# Altium PCB PCB1.PcbDoc
Units mm, origin at the board's own origin, x right, y up, seen from the top; angles counter-clockwise.
Board outline 50 x 30 mm, 2 copper layers (Top Layer, Bottom Side); 3 components, 34 nets, 78 pads, 0 vias.
Unrouted connection lines stored in the file: 3.
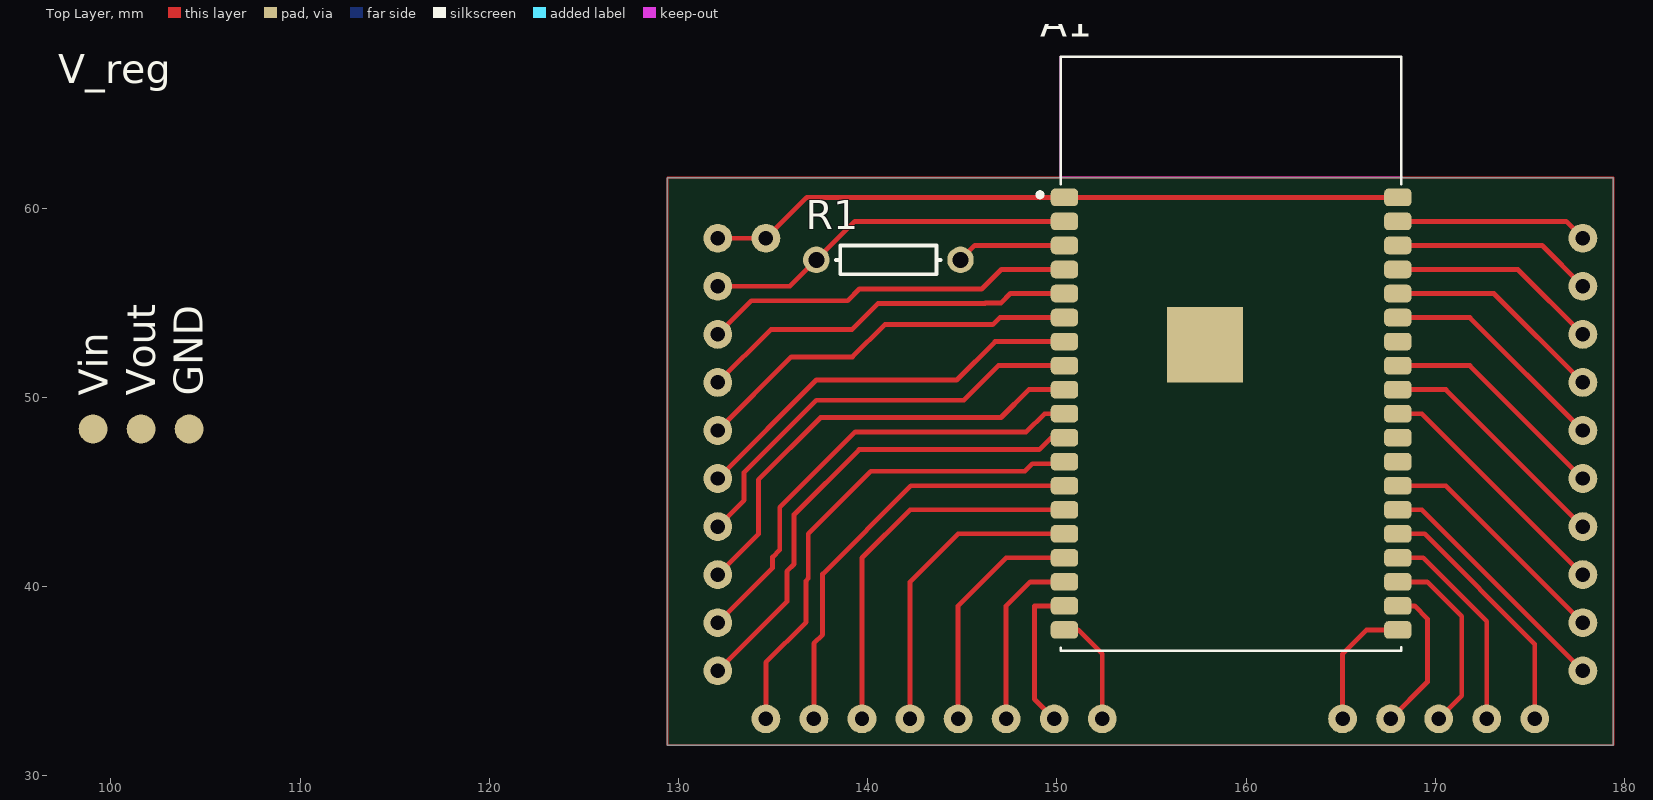
[diagram p0: Top Layer view]
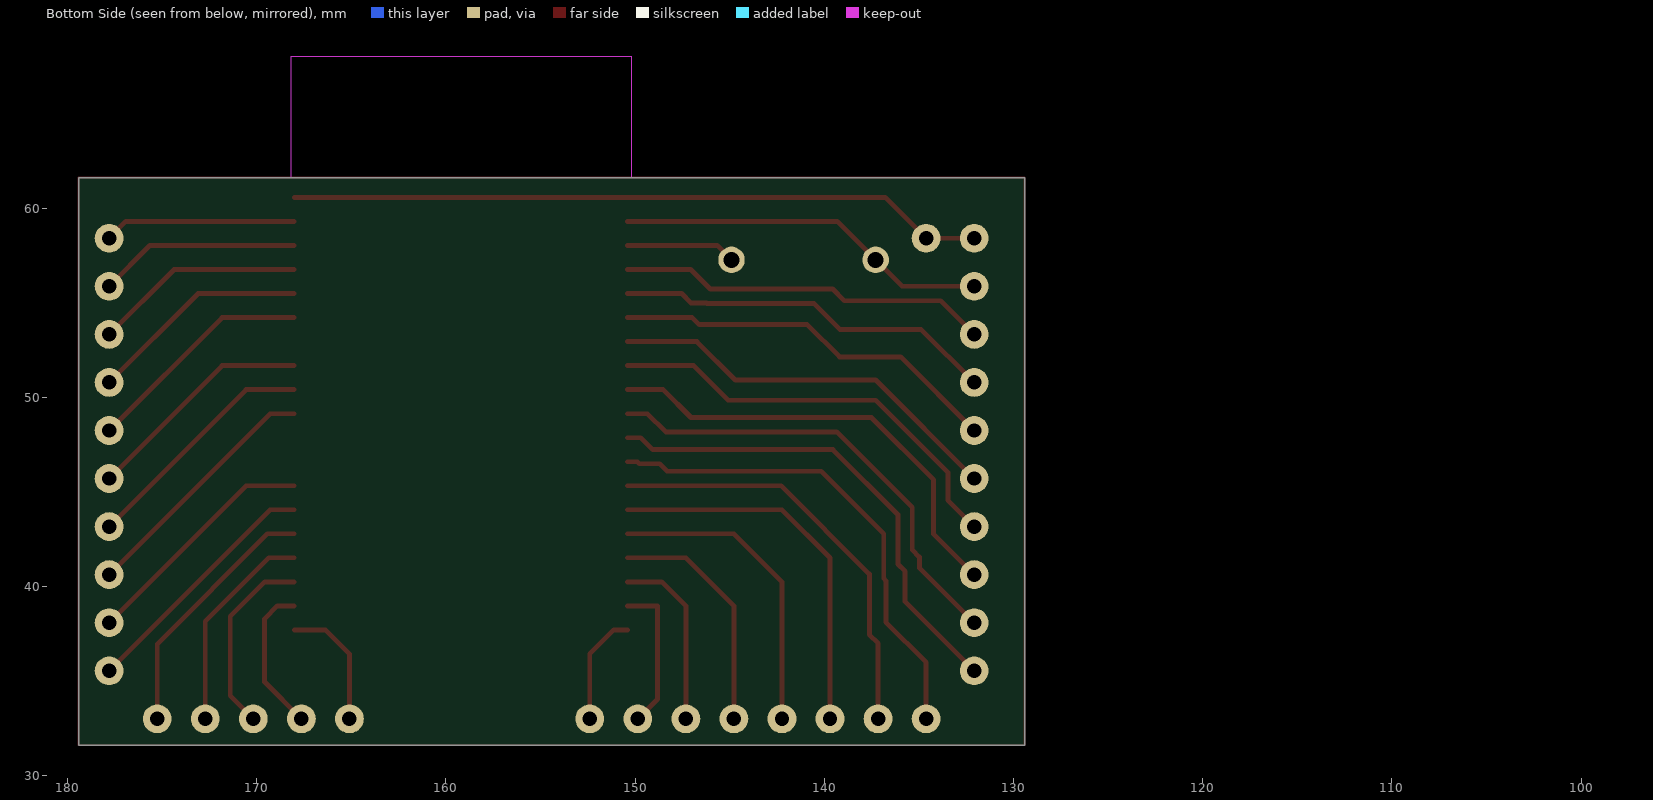
[diagram p1: Bottom Side view, seen from below]

## Layer stack, top to bottom
Top Solder: solder mask 0.0102, Solder Resist, Dk 3.5
Top Layer: signal copper 0.0356
Dielectric 1: dielectric 0.32, FR-4, Dk 4.8
Bottom Side: signal copper (thickness not stored)

## Board outline
129.413,31.623 129.413,61.623 179.413,61.623 179.413,31.623

## Design rules (kind name [scope] priority, off if disabled: settings)
Clearance [All] p1: gap=0.5 ignorepadtopadclearanceinfootprint=FALSE
PolygonConnect [All] p1: connectstyle=Relief reliefconductorwidth=0.254 reliefentries=4 polygonreliefangle="90 Angle" airgapwidth=0.254
RoutingVias [All] p1: holewidth=0.711 width=1.27 viastyle="Through Hole" minholewidth=0.711 minwidth=1.27 maxholewidth=0.711 maxwidth=1.27
SolderMaskExpansion [All] p1: expansion=0.102 istentingtop=FALSE
Width [All] p1: maxlimit=0.254 minlimit=0.254 preferedwidth=0.254 substack1={1347EED0-281A-4116-A668-90E2841A33EA}
30 further rules are at their usual default settings.

## Components (designator, comment, footprint, x,y, rotation, side; value= is the part's Value field where it differs from the comment)
A1 "ESP32-WROVER-I" XCVR_ESP32-WROVER-I 159.211,52.319 r0 top
R1 "Res1" AXIAL-0.3 141.097,57.277 r180 top value=10K
V_reg "AMS1117 Breakout Board" "AMS1117 Breakout Board" 101.6,53.34 r0 top

## Footprints (in the part's own frame and the unit in brackets; to place one, negate y for a bottom-side part, rotate by r counter-clockwise, add the part's x,y. Pads: shape width x height; smd on the part's side, far side on the other; paste and mask are expansions set on the pad)
"AMS1117 Breakout Board" [mil]
  round 60 smd: GND(100,-196.85) VIN(-100,-196.85) VOUT(0,-196.85)
  body extent -173,-251 173,472, height 171
AXIAL-0.3 [mm] "Axial Device, Thru-Hole; 2 Leads; 0.3 in Pin Spacing"
  round 1.4 hole 0.85: 1(-3.81,0) 2(3.81,0)
  silkscreen extent -2.77,-0.76 2.77,0.76
XCVR_ESP32-WROVER-I [mm]
  rrect50% 1.45x0.93 smd: 1(-8.81,8.26) 2(-8.81,6.99) 3(-8.81,5.72) 4(-8.81,4.45) 5(-8.81,3.18) 6(-8.81,1.91) 7(-8.81,0.64) 8(-8.81,-0.63) 9(-8.81,-1.9) 10(-8.81,-3.17) 11(-8.81,-4.44) 12(-8.81,-5.71) 13(-8.81,-6.98) 14(-8.81,-8.25) 15(-8.81,-9.52) 16(-8.81,-10.79) 17(-8.81,-12.06) 18(-8.81,-13.33) 19(-8.81,-14.6) 20(8.81,-14.6) 21(8.81,-13.33) 22(8.81,-12.06) 23(8.81,-10.79) 24(8.81,-9.52) 25(8.81,-8.25) 26(8.81,-6.98) 27(8.81,-5.71) 28(8.81,-4.44) 29(8.81,-3.17) 30(8.81,-1.9) 31(8.81,-0.63) 32(8.81,0.64) 33(8.81,1.91) 34(8.81,3.18) 35(8.81,4.45) 36(8.81,5.72) 37(8.81,6.99) 38(8.81,8.26)
  rect 4x4 smd paste-0.733: 39(-1.38,0.47)
  Keep-Out Layer region: 9,9.33 -9.029,9.33 -9.029,15.7 9,15.7
  Keep-Out Layer region: 9,9.331 -9.03,9.331 -9.03,15.7 9,15.7
  silkscreen extent -10.22,-15.7 9,15.7

## Part data
A1: "Module: combo; GPIO, I2C x2, I2S x2, SDIO, SPI x3, UART x3; U.FL", Package=None, Availability=Unavailable, MP=ESP32-WROVER-I, Price=None
R1: "Resistor", LatestRevisionDate=17-Jul-2002, LatestRevisionNote="Re-released for DXP Platform.", PackageDescription="Axial Device, Thru-Hole; 2 Leads; 0.3 in Pin Spacing", PackageReference=AXIAL-0.3, Published=8-Jun-2000, Publisher="Altium Limited"

## Free pads (board coordinates)
  round 1.524 hole 0.762: 25(132.08,58.42) 26(132.08,55.88) 27(132.08,53.34) 28(132.08,50.8) 29(132.08,48.26) 30(132.08,45.72) 31(132.08,43.18) 32(132.08,40.64) 33(132.08,38.1) 34(132.08,35.56) 35(177.8,58.42) 36(177.8,55.88) 37(177.8,53.34) 38(177.8,50.8) 39(177.8,48.26) 40(177.8,45.72) 41(177.8,43.18) 42(177.8,40.64) 43(177.8,38.1) 44(177.8,35.56) 45(175.26,33.02) 46(172.72,33.02) 47(170.18,33.02) 48(167.64,33.02) 49(134.62,33.02) 50(137.16,33.02) 51(139.7,33.02) 52(165.1,33.02) 53(142.24,33.02) 54(144.78,33.02) 55(147.32,33.02) 56(149.86,33.02) 57(152.4,33.02) 58(134.62,58.42)

## Nets (pads, with @x,y where several pads share a name; then routed paths per layer and width w, separated by ;. In a path a pad name is that pad's centre, name@x,y a point inside that pad or via, vN(x,y) a via of type N, cw(c..) or ccw(c..) an arc to the next point about the centre after c; other vN are vias at no path point)
3.3v: A1.2 pad.26 R1.2 V_reg.VOUT | length 19.7
  Top Layer w0.254: pad.26 135.89,55.88 R1.2 139.319,59.309 A1.2
5v: V_reg.VIN
en: A1.3 R1.1 | length 5.8
  Top Layer w0.254: R1.1 145.669,58.039 A1.3
GND: A1.1 A1.15 A1.38 pad.25 pad.53 pad.58 V_reg.GND | length 53.3
  Top Layer w0.254: pad.25 pad.58 136.779,60.579 A1.1 A1.38 ; pad.53 142.24,40.259 144.78,42.799 A1.15
io0: A1.25 pad.44 | length 13.3
  Top Layer w0.254: A1.25 169.291,44.069 pad.44
io2: A1.24 pad.45 | length 13.6
  Top Layer w0.254: A1.24 169.433,42.799 175.26,36.972 pad.45
io4: A1.26 pad.43 | length 12.8
  Top Layer w0.254: A1.26 170.561,45.339 pad.43
io5: A1.29 pad.42 | length 13.3
  Top Layer w0.254: A1.29 169.291,49.149 pad.42
io12: A1.14 pad.51 | length 20.3
  Top Layer w0.254: pad.51 139.7,41.529 142.24,44.069 A1.14
io13: A1.16 pad.54 | length 12.6
  Top Layer w0.254: pad.54 144.78,38.989 147.32,41.529 A1.16
io14: A1.13 pad.50 | length 22.6
  Top Layer w0.254: pad.50 137.16,37.01 137.615,37.465 137.615,40.667 142.288,45.339 A1.13
io15: A1.23 pad.46 | length 11.2
  Top Layer w0.254: A1.23 169.367,41.529 172.72,38.176 pad.46
io18: A1.30 pad.41 | length 12.8
  Top Layer w0.254: A1.30 170.561,50.419 pad.41
io19: A1.31 pad.40 | length 12.3
  Top Layer w0.254: A1.31 171.831,51.689 pad.40
io21: A1.33 pad.39 | length 12.3
  Top Layer w0.254: A1.33 171.831,54.229 pad.39
io22: A1.36 pad.36 | length 10.7
  Top Layer w0.254: A1.36 175.641,58.039 pad.36
io23: A1.37 pad.35 | length 10.1
  Top Layer w0.254: A1.37 176.911,59.309 pad.35
io25: A1.10 pad.33 | length 24.6
  Top Layer w0.254: pad.33 134.976,40.996 134.976,41.57 135.353,41.947 135.353,44.196 139.341,48.184 148.387,48.184 149.352,49.149 A1.10
io26: A1.11 pad.34 | length 25.9
  Top Layer w0.254: pad.34 135.731,39.211 135.731,40.817 136.107,41.193 136.107,43.815 139.545,47.252 149.073,47.252 149.7,47.879 A1.11
io27: A1.12 pad.49 | length 25.8
  Top Layer w0.254: pad.49 134.62,36.001 136.745,38.125 136.745,40.323 136.861,40.439 136.861,42.802 140.16,46.101 148.311,46.101 148.708,46.498 149.771,46.498 149.882,46.609 A1.12
io32: A1.8 pad.31 | length 22.7
  Top Layer w0.254: pad.31 133.469,44.569 133.469,46.043 137.287,49.86 145.085,49.86 146.914,51.689 A1.8
io33: A1.9 pad.32 | length 24.1
  Top Layer w0.254: pad.32 134.223,42.783 134.223,45.653 137.516,48.946 147.049,48.946 148.522,50.419 A1.9
io34: A1.6 pad.29 | length 20.8
  Top Layer w0.254: pad.29 135.966,52.146 139.192,52.146 140.9,53.854 146.616,53.854 146.991,54.229 A1.6
io35: A1.7 pad.30 | length 21.3
  Top Layer w0.254: pad.30 137.287,50.927 144.704,50.927 146.736,52.959 A1.7
rxd: A1.34 pad.38 | length 11.7
  Top Layer w0.254: A1.34 173.101,55.499 pad.38
sck/clk: A1.20 pad.52 | length 6.9
  Top Layer w0.254: pad.52 165.1,36.449 166.37,37.719 A1.20
scs/cmd: A1.19 pad.57 | length 6
  Top Layer w0.254: A1.19 151.13,37.719 152.4,36.449 pad.57
sd0: A1.21 pad.48 | length 7.9
  Top Layer w0.254: pad.48 169.588,34.968 169.588,38.311 168.91,38.989 A1.21
sd1: A1.22 pad.47 | length 10.1
  Top Layer w0.254: A1.22 169.571,40.259 171.399,38.431 171.399,34.239 pad.47
sd2: A1.17 pad.55 | length 9.6
  Top Layer w0.254: pad.55 147.32,38.989 148.59,40.259 A1.17
sd3: A1.18 pad.56 | length 8
  Top Layer w0.254: pad.56 148.819,34.061 148.819,38.989 A1.18
txd: A1.35 pad.37 | length 11.2
  Top Layer w0.254: A1.35 174.371,56.769 pad.37
vn: A1.5 pad.28 | length 20.3
  Top Layer w0.254: pad.28 134.874,53.594 139.167,53.594 140.538,54.966 146.202,54.966 146.228,54.991 147.041,54.991 147.549,55.499 A1.5
vp: A1.4 pad.27 | length 19.7
  Top Layer w0.254: pad.27 133.858,55.118 138.937,55.118 139.556,55.737 146.034,55.737 147.066,56.769 A1.4
pads on no net: A1.27 A1.28 A1.32 A1.39
copper on no net: | length 160
  Top Layer w0.1: 129.413,31.623 179.413,31.623 179.413,61.623 129.413,61.623 129.413,31.623

## Text inside footprints (layer, text, board x,y; h text height)
V_reg: Top Overlay "Vin" at 99.846,50.094 h1.52 r90; Top Overlay "Vout" at 102.346,50.094 h1.52 r90; Top Overlay "GND" at 104.846,50.094 h1.52 r90